# EAGLE board ChessMateBattery_revD (EAGLE 9.1.0)
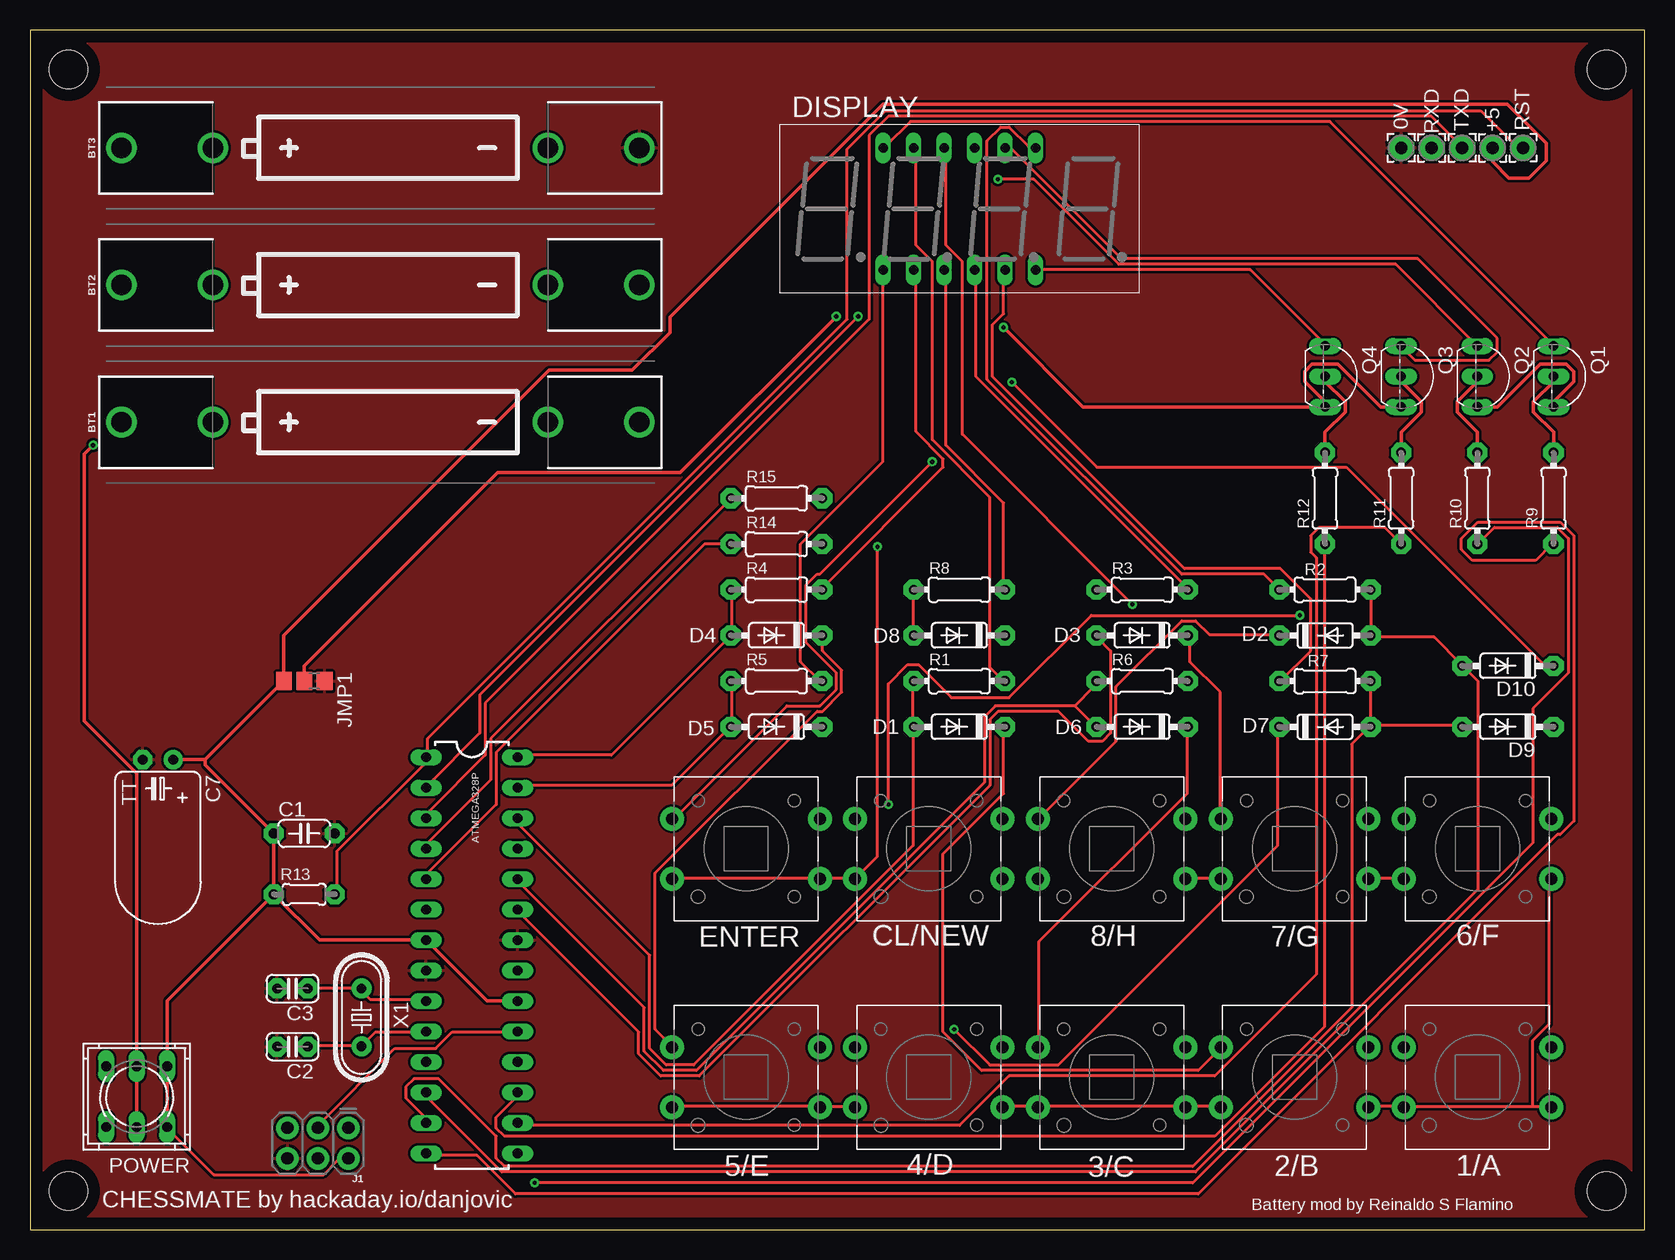
[diagram p0: board, top side]
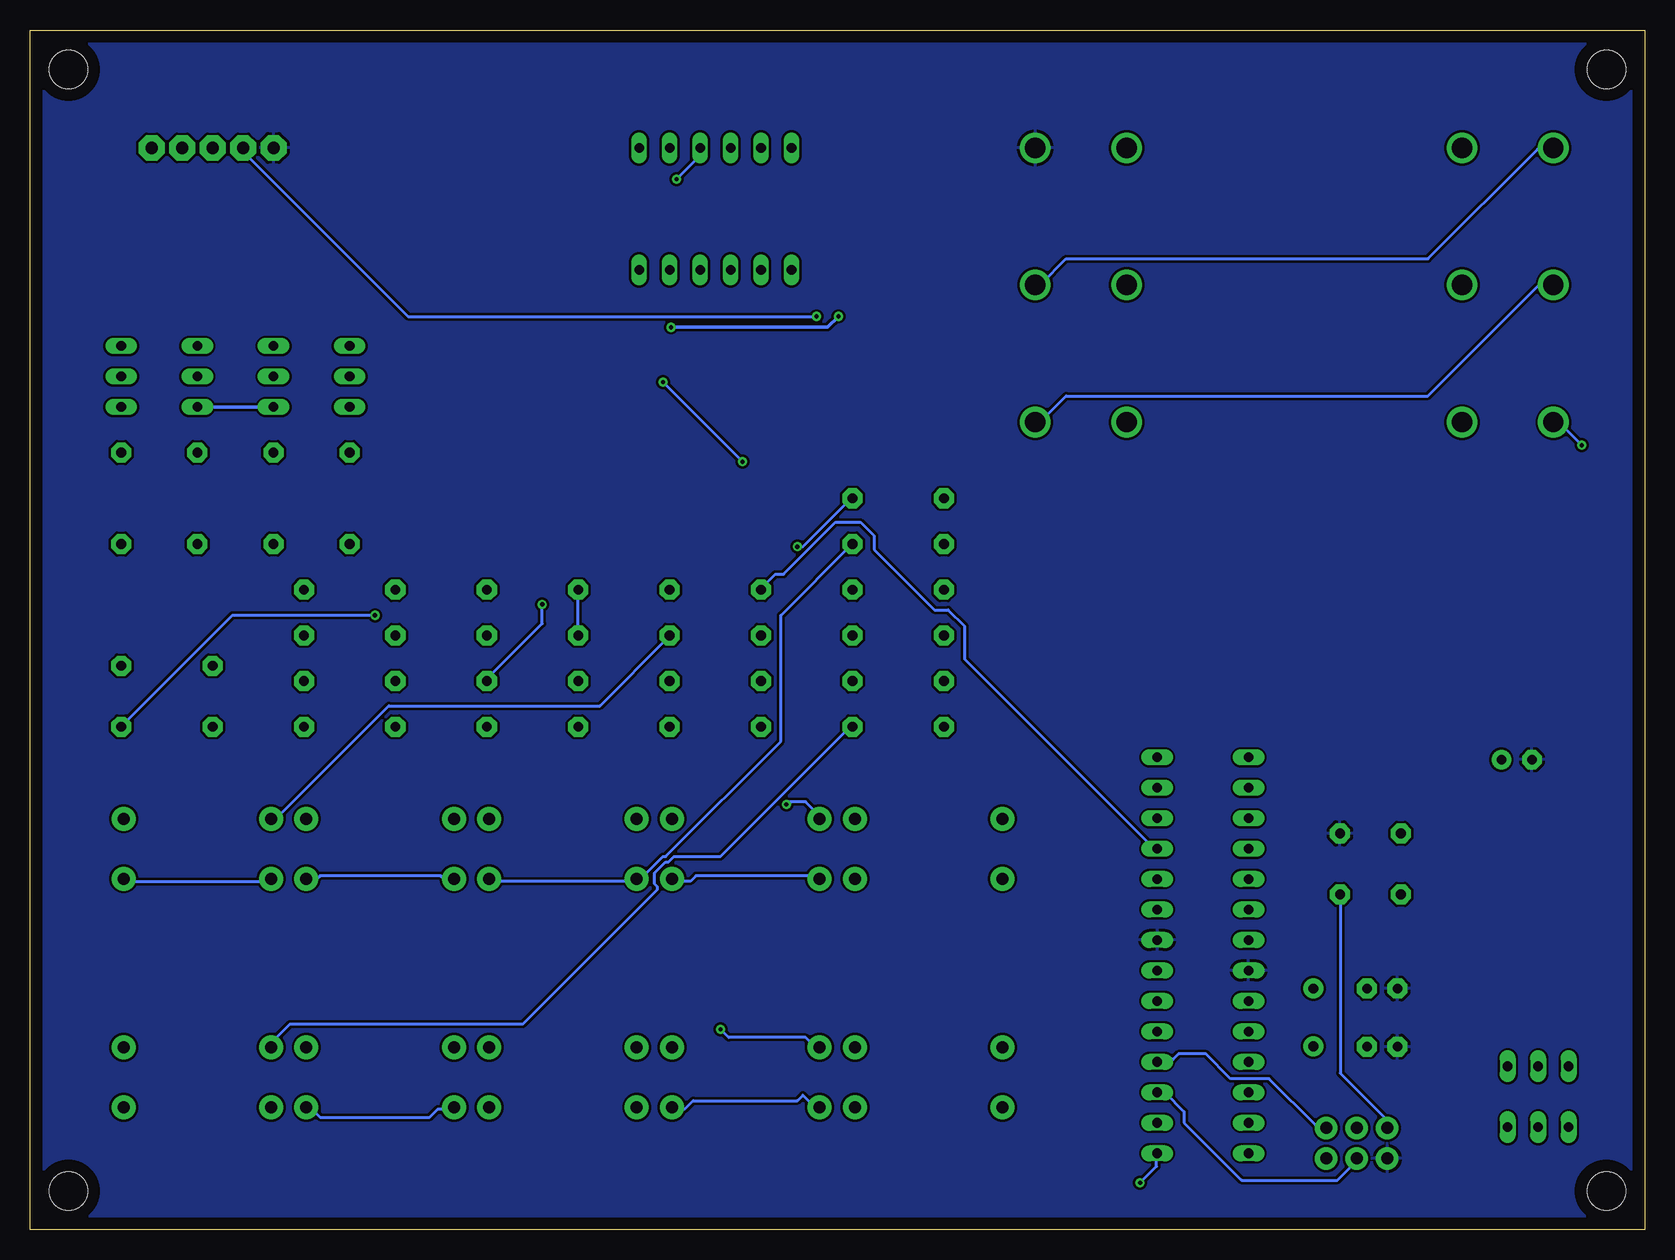
[diagram p1: board, bottom side, seen from below]

Size 134.6 x 100 mm. Coordinates in mm from the lower left corner, seen from the top.
Outline: 0,0 134.6,0 134.6,100 0,100 0,0
Copper layers (1*16): Top 0.035mm / dielectric 1.5mm / Bottom 0.035mm
Design rules "default *": minimum track width 10mil, minimum drill 0.35mm, track to track 8mil, track to pad 8mil, pad to pad 8mil, via to via 8mil, smd to smd 8mil, copper to edge 40mil, drill to drill 6mil, minimum pad ring 10mil, minimum via ring 8mil, stop-mask expansion 4mil, vias tented up to drill 0mil, thermal gap 10mil
Holes 3.2 mm at 3.2,96.7 3.2,3.2 131.4,3.2 131.4,96.7

## Footprints (pad centres in the part's own frame; a part is rotated, then mirrored left to right if it is on the bottom)
2,15/1,0 = drill 1.016 pad 2.159 octagon: 1 0,0
TACT_SW = drill 1 pad 2: A -6.15,2.5; B 6.15,2.5; C -6.15,-2.5; D 6.15,-2.5
DIL28-3 = drill 0.813 long: 1 -16.51,-3.81; 2 -13.97,-3.81; 3 -11.43,-3.81; 4 -8.89,-3.81; 5 -6.35,-3.81; 6 -3.81,-3.81; 7 -1.27,-3.81; 8 1.27,-3.81; 9 3.81,-3.81; 10 6.35,-3.81; 11 8.89,-3.81; 12 11.43,-3.81; 13 13.97,-3.81; 14 16.51,-3.81; 15 16.51,3.81; 16 13.97,3.81; 17 11.43,3.81; 18 8.89,3.81; 19 6.35,3.81; 20 3.81,3.81; 21 1.27,3.81; 22 -1.27,3.81; 23 -3.81,3.81; 24 -6.35,3.81; 25 -8.89,3.81; 26 -11.43,3.81; 27 -13.97,3.81; 28 -16.51,3.81
BATTERY-AAA-KIT = drill 1.702: GND@1 21.59,0; GND@2 13.97,0; PWR@1 -21.59,0; PWR@2 -13.97,0
C050-024X044L = drill 0.813 pad 1.676 octagon: 1 -2.54,0; 2 2.54,0
C025-024X044L = drill 0.813 pad 1.676 octagon: 1 -1.27,0; 2 1.27,0
TT2D7L = drill 0.813 pad 1.6: + -1.27,0 | drill 0.813 pad 1.6 octagon: - 1.27,0
DO35-7 = drill 0.813 pad 1.676 octagon: A 3.81,0; C -3.81,0
TOF3461BH-N = drill 0.8 long: 1 -6.35,-5.08; 2 -3.81,-5.08; 3 -1.27,-5.08; 4 1.27,-5.08; 5 3.81,-5.08; 6 6.35,-5.08; 7 6.35,5.08; 8 3.81,5.08; 9 1.27,5.08; 10 -1.27,5.08; 11 -3.81,5.08; 12 -6.35,5.08
2X3-NS = drill 1.016 pad 1.88: 1 -2.54,-1.27; 2 -2.54,1.27; 3 0,-1.27; 4 0,1.27; 5 2.54,-1.27; 6 2.54,1.27
A0R-JMP = smd 1.5 x 1.3: 1 0,1.7; 2 0,0; 3 0,-1.7
9077-2 = drill 0.813 long: 1 -2.54,2.54; 2 0,2.54; 3 2.54,2.54; 4 -2.54,-2.54; 5 0,-2.54; 6 2.54,-2.54
TO92-EBC = drill 0.813 long: B 0,-1.27; C -2.54,-1.27; E 2.54,-1.27
0204/7L = drill 0.813 pad 1.676 octagon: 1 -3.81,0; 2 3.81,0
0204/5L = drill 0.813 pad 1.676 octagon: 1 -2.54,0; 2 2.54,0
HC49/SL = drill 0.813 pad 1.676: 1 -2.413,0; 2 2.413,0

## Placement (x,y rotation side)
0V  [2,15/1,0]  114.3,90.17 0 top
1/A  1/A  [TACT_SW]  120.65,12.7 0 top
2/B  2/B  [TACT_SW]  105.41,12.7 0 top
3/C  3/C  [TACT_SW]  90.17,12.7 0 top
4/D  4/D  [TACT_SW]  74.93,12.7 0 top
5/E  5/E  [TACT_SW]  59.69,12.7 0 top
6/F  6/F  [TACT_SW]  120.65,31.75 0 top
7/G  7/G  [TACT_SW]  105.41,31.75 0 top
8/H  8/H  [TACT_SW]  90.17,31.75 0 top
+5  [2,15/1,0]  121.92,90.17 180 top
ATMEGA328P  ATMEGA328P  [DIL28-3]  36.83,22.86 270 top
BT1  [BATTERY-AAA-KIT]  29.21,67.31 0 top
BT2  [BATTERY-AAA-KIT]  29.21,78.74 0 top
BT3  [BATTERY-AAA-KIT]  29.21,90.17 0 top
C1  100n  [C050-024X044L]  22.86,33.02 0 top
C2  22P  [C025-024X044L]  21.88,15.24 180 top
C3  22P  [C025-024X044L]  21.88,20.09 180 top
C7  10u  [TT2D7L]  10.67,39.17 180 top
CL/NEW  CL/NEW  [TACT_SW]  74.93,31.75 0 top
D1  4148  [DO35-7]  77.47,41.91 180 top
D2  4148  [DO35-7]  107.95,49.53 0 top
D3  4148  [DO35-7]  92.71,49.53 180 top
D4  4148  [DO35-7]  62.23,49.53 180 top
D5  4148  [DO35-7]  62.23,41.91 180 top
D6  4148  [DO35-7]  92.71,41.91 180 top
D7  4148  [DO35-7]  107.95,41.91 0 top
D8  4148  [DO35-7]  77.47,49.53 180 top
D9  4148  [DO35-7]  123.19,41.91 180 top
D10  4148  [DO35-7]  123.19,46.99 180 top
DISPLAY  [TOF3461BH-N]  77.47,85.09 0 top
ENTER  ENTER  [TACT_SW]  59.69,31.75 0 top
J1  AVR_SPI_PROG_3X2NS  [2X3-NS]  24,7.2 180 top
JMP1  0R-JUMPA  [A0R-JMP]  22.86,45.72 270 top
POWER  9077-2  [9077-2]  8.89,11.07 180 top
Q1  BC3x8  [TO92-EBC]  128.27,71.12 270 top
Q2  BC3x8  [TO92-EBC]  121.92,71.12 270 top
Q3  BC3x8  [TO92-EBC]  115.57,71.12 270 top
Q4  BC3x8  [TO92-EBC]  109.22,71.12 270 top
R1  470  [0204/7L]  77.47,45.72 0 top
R2  470  [0204/7L]  107.95,53.34 180 top
R3  470  [0204/7L]  92.71,53.34 0 top
R4  470  [0204/7L]  62.23,53.34 0 top
R5  470  [0204/7L]  62.23,45.72 0 top
R6  470  [0204/7L]  92.71,45.72 0 top
R7  470  [0204/7L]  107.95,45.72 180 top
R8  470  [0204/7L]  77.47,53.34 0 top
R9  10k  [0204/7L]  127,60.96 90 top
R10  10k  [0204/7L]  120.65,60.96 90 top
R11  10k  [0204/7L]  114.3,60.96 90 top
R12  10k  [0204/7L]  107.95,60.96 90 top
R13  10K  [0204/5L]  22.86,27.94 0 top
R14  10k  [0204/7L]  62.23,57.15 0 top
R15  10k  [0204/7L]  62.23,60.96 0 top
RST  [2,15/1,0]  124.46,90.17 0 top
RXD  [2,15/1,0]  116.84,90.17 180 top
TXD  [2,15/1,0]  119.38,90.17 0 top
X1  16.0  [HC49/SL]  27.63,17.68 90 top

## Library data of the parts
0V +5 RST RXD TXD = wirepad
1/A 2/B 3/C 4/D 5/E 6/F 7/G 8/H CL/NEW D1-D10 ENTER = XessMate
ATMEGA328P = SparkFun-DigitalIC
BT1-BT3 = SparkFun-Batteries; PROD_ID: BATT-08571; SF_SKU: PRT-12718
C1-C3 C7 R1-R15 = rcl
DISPLAY = 7Segment-Displays
J1 = SparkFun-Connectors
JMP1 = jump-0r-smd
POWER = switch-misc
Q1-Q4 = transistor-npn
X1 = crystal

## Nets
A: ATMEGA328P.26 D1.A R1.1
B: ATMEGA328P.12 D2.A D10.A R2.1
C: ATMEGA328P.23 D3.A R3.1
CONTROLE: ATMEGA328P.4 R15.1
CONTROLE_: CL/NEW.C CL/NEW.D ENTER.C ENTER.D R15.2
D: ATMEGA328P.28 D4.A R4.1
DP: ATMEGA328P.25 D8.A R8.1
E: ATMEGA328P.27 D5.A R5.1
F: ATMEGA328P.24 D6.A R6.1
G: ATMEGA328P.13 D7.A D9.A R7.1
GND: 0V.1 ATMEGA328P.8 ATMEGA328P.22 BT3.GND@1 C1.2 C2.2 C3.2 C7.- J1.6 JMP1.1
JOGADA: ATMEGA328P.5 R14.1
JOGADA_C: 1/A.C 1/A.D 2/B.C 2/B.D 3/C.C 3/C.D 4/D.C 4/D.D 5/E.C 5/E.D 6/F.C 6/F.D 7/G.C 7/G.D 8/H.C 8/H.D R14.2
K1: ATMEGA328P.14 R9.1
K2: ATMEGA328P.15 R10.1
K3: ATMEGA328P.16 R11.1
K4: ATMEGA328P.17 J1.4 R12.1
MISO: ATMEGA328P.18 J1.1
N$1: DISPLAY.11 R1.2
N$2: DISPLAY.7 R2.2
N$3: DISPLAY.4 R3.2
N$4: DISPLAY.2 R4.2
N$5: DISPLAY.1 R5.2
N$6: DISPLAY.10 R6.2
N$7: DISPLAY.5 R7.2
N$8: DISPLAY.3 R8.2
N$9: Q1.B R9.2
N$10: Q2.B R10.2
N$11: Q3.B R11.2
N$12: Q4.B R12.2
N$13: DISPLAY.12 Q1.C
N$14: DISPLAY.9 Q2.C
N$15: DISPLAY.8 Q3.C
N$16: DISPLAY.6 Q4.C
N$18: ATMEGA328P.9 C3.1 X1.2
N$19: ATMEGA328P.10 C2.1 X1.1
N$20: BT1.PWR@1 POWER.2 POWER.5
N$21: CL/NEW.A D9.C
N$22: D10.C ENTER.A
N$23: 2/B.A D1.C
N$24: 8/H.A D2.C
N$25: 5/E.A D4.C
N$26: 1/A.A D5.C
N$27: 3/C.A D6.C
N$28: 4/D.A D7.C
N$29: 6/F.A D8.C
N$30: 7/G.A D3.C
N$31: BT1.GND@1 BT2.PWR@1
N$33: BT2.GND@1 BT3.PWR@1
N$42: JMP1.2 Q1.E Q2.E Q3.E Q4.E
RST: ATMEGA328P.1 J1.5 R13.2 RST.1
RX-IN: ATMEGA328P.2 RXD.1
SCK: ATMEGA328P.19 J1.3
TX-OUT: ATMEGA328P.3 TXD.1
VCC: +5.1 ATMEGA328P.7 ATMEGA328P.20 C1.1 C7.+ J1.2 JMP1.3 POWER.1 POWER.4 R13.1

## Tracks (layer width: path | path; a pad name or v marks a point on that pad's centre or on a via)
A
  Top 0.254: ATMEGA328P.26 40.69,34.29 40.69,33.83 51.66,22.86 51.66,15.09 53.03,13.72 55.32,13.72 73.61,32 73.61,41.83 D1.A 73.61,42.06 73.61,45.72 R1.1
B
  Top 0.254: R2.1 111.78,53.26 111.78,49.61 D2.A 111.78,49.38 117.04,49.38 119.33,47.09 D10.A 119.56,46.86 120.7,45.72 120.7,28.35 97.16,4.8 39.32,4.8 33.15,10.97 33.15,11.43 ATMEGA328P.12
C
  Top 0.254: ATMEGA328P.23 40.69,26.52 50.75,16.46 50.75,14.63 52.58,12.8 55.78,12.8 80.01,37.03 80.01,42.52 80.7,43.2 85.72,43.2 88.24,40.69 89.38,40.69 90.07,41.38 90.07,48.23 88.92,49.38 D3.A
  Bottom 0.254: R3.1 88.92,53.26 88.92,49.61 D3.A
CONTROLE
  Top 0.254: ATMEGA328P.4 33.15,31.77 33.15,32.23 38.41,37.49 38.41,40.92 58.29,60.81 R15.1
CONTROLE_  (via drill 0.35)
  Top 0.254: ENTER.C 53.72,29.26 ENTER.D 66.06,29.26 68.58,29.26 CL/NEW.C 68.81,29.26 70.64,31.09 v70.64,56.92
  Bottom 0.254: v70.64,56.92 70.18,56.92 66.29,60.81 66.06,60.81 R15.2 | CL/NEW.D 80.92,29.03 79.55,29.03 79.1,29.49 69.04,29.49 68.81,29.26 CL/NEW.C
D
  Top 0.254: ATMEGA328P.28 40.69,39.55 48.46,39.55 58.29,49.38 D4.A 58.52,49.61 58.52,53.26 R4.1
DP
  Top 0.254: D8.A 73.61,49.61 73.61,53.26 R8.1
  Bottom 0.254: ATMEGA328P.25 40.69,31.77 41.15,32.23 41.38,32.23 56.69,47.55 56.69,50.29 58.06,51.66 59.21,51.66 64.24,56.69 64.24,57.84 65.38,58.98 67.44,58.98 71.78,54.63 72.47,54.63 73.61,53.49 R8.1
E
  Top 0.254: ATMEGA328P.27 40.69,37.03 53.49,37.03 58.29,41.83 D5.A 58.52,42.06 58.52,45.72 R5.1
F
  Top 0.254: 87.1,43.66 80.47,43.66 79.55,42.75 79.55,37.26 55.55,13.26 52.81,13.26 51.21,14.86 51.21,18.52 40.69,29.03 ATMEGA328P.24 | 87.1,43.66 88.7,42.06 D6.A | 87.1,43.66 88.7,45.26 88.7,45.72 R6.1
G
  Top 0.254: ATMEGA328P.13 32.92,8.91 32.92,9.37 31.32,10.97 31.32,11.89 32,12.57 34.06,12.57 38.86,7.77 38.86,5.94 39.55,5.26 96.93,5.26 110.19,18.52 110.19,40.46 111.56,41.83 D7.A 111.78,42.06 | 111.78,42.06 111.78,45.72 R7.1 | 111.78,42.06 119.33,42.06 D9.A
GND
  pour Top: 0,100.03 134.62,100.03 134.62,0 0,0
  pour Bottom: 0,100.03 134.62,100.03 134.62,0 0,0
JOGADA
  Top 0.254: R14.1 56.24,57.15 38.86,39.78 38.86,35.43 33.15,29.72 33.15,29.26 ATMEGA328P.5
JOGADA_C
  Top 0.254: 5/E.C 53.72,10.29 65.84,10.29 5/E.D 66.06,10.29 68.58,10.29 4/D.C | 4/D.D 81.15,10.29 83.9,10.29 3/C.C 84.12,10.29 96.24,10.29 3/C.D 96.47,10.29 99.21,10.29 2/B.C | 7/G.D 111.78,29.26 114.3,29.26 6/F.C | 2/B.D 111.78,10.29 114.3,10.29 1/A.C 114.53,10.29 125.27,10.29 | 125.27,10.29 126.64,10.29 1/A.D | 125.27,10.29 125.27,15.77 126.64,17.14 126.64,29.03 6/F.D | 8/H.D 96.47,29.26 99.21,29.26 7/G.C
  Bottom 0.254: 4/D.C 68.81,10.29 69.27,10.29 70.18,11.2 70.64,10.74 79.32,10.74 80.01,10.06 80.92,10.06 4/D.D | 6/F.C 114.53,29.03 126.64,29.03 6/F.D | R14.2 66.06,57.15 72.01,51.21 72.01,40.69 81.61,31.09 81.84,31.09 83.9,29.03 8/H.C 84.12,29.03 96.24,29.03 8/H.D | 7/G.D 110.64,29.26 110.41,29.49 100.36,29.49 100.13,29.26 99.44,29.26 7/G.C | 2/B.C 99.44,10.06 100.58,10.06 101.27,9.37 110.41,9.37 111.1,10.06 111.56,10.06 2/B.D
K1
  Top 0.254: ATMEGA328P.14 33.15,6.17 37.26,6.17 40.46,2.97 97.38,2.97 127.33,32.92 127.56,32.92 128.7,34.06 128.7,57.84 127.56,58.98 120.7,58.98 119.33,57.61 119.33,56.69 120.24,55.78 125.5,55.78 126.87,57.15 R9.1
K2  (via drill 0.35)
  Top 0.254: v42.06,3.89 96.93,3.89 125.27,32.23 125.27,43.43 128.25,46.41 128.25,57.61 127.33,58.52 122.07,58.52 120.7,57.15 R10.1
  Bottom 0.254: v42.06,3.89 40.69,5.26 40.69,6.17 ATMEGA328P.15
K3
  Top 0.254: R11.1 112.93,58.52 107.44,58.52 106.76,57.84 106.76,56.46 107.21,56.01 107.21,21.26 98.75,12.8 81.61,12.8 77.5,8.69 40.69,8.69 ATMEGA328P.16
K4
  Top 0.254: ATMEGA328P.17 40.46,11.43 40.46,10.97 38.86,9.37 38.86,8.46 39.55,7.77 98.75,7.77 107.9,16.92 107.9,57.15 R12.1
  Bottom 0.254: J1.4 24,5.71 25.6,4.12 33.6,4.12 38.41,8.91 38.41,9.83 40.01,11.43 40.46,11.43 ATMEGA328P.17
MISO
  Bottom 0.254: ATMEGA328P.18 40.46,14.17 39.32,14.17 38.86,14.63 36.58,14.63 34.52,12.57 31.32,12.57 27.43,8.69 26.75,8.69 J1.1
N$1
  Top 0.254: DISPLAY.11 73.84,90.07 73.84,82.07 75.21,80.7 75.21,65.84 80.01,61.04 80.01,46.86 81.15,45.72 R1.2
N$2
  Top 0.254: DISPLAY.7 83.67,90.3 83.21,90.3 81.61,91.9 80.92,91.9 79.78,90.75 79.78,70.87 96.01,54.63 102.87,54.63 104.01,53.49 R2.2
N$3
  Top 0.254: DISPLAY.4 78.87,80.01 78.87,71.09 96.47,53.49 R3.2
N$4
  Top 0.254: DISPLAY.2 73.84,80.01 73.84,66.52 76.12,64.24 76.12,63.55 66.06,53.49 R4.2
N$5
  Top 0.254: DISPLAY.1 71.09,80.01 71.09,64.01 64.24,57.15 64.24,47.32 65.84,45.72 R5.2
N$6  (via drill 0.35)
  Top 0.254: v91.9,52.12 77.72,66.29 77.72,80.7 76.35,82.07 76.35,90.07 DISPLAY.10
  Bottom 0.254: v91.9,52.12 91.9,50.52 96.7,45.72 R6.2
N$7
  Top 0.254: DISPLAY.5 81.15,80.01 81.15,76.35 80.24,75.44 80.24,71.09 96.24,55.09 104.24,55.09 106.76,52.58 106.76,48.23 104.24,45.72 R7.2
N$8
  Top 0.254: DISPLAY.3 76.35,80.01 76.35,65.38 81.15,60.58 81.15,53.49 R8.2
N$9
  Top 0.305: R9.2 127,66.48 125.32,68.16 125.32,69 127,70.68 Q1.B
N$10
  Top 0.305: Q2.B 120.65,70.68 118.97,69 118.97,68.16 120.65,66.48 R10.2
N$11
  Top 0.305: Q3.B 114.3,70.68 115.98,69 115.98,68.16 114.3,66.48 R11.2
N$12
  Top 0.305: R12.2 107.95,66.48 109.63,68.16 109.63,69 107.95,70.68 Q4.B
N$13
  Top 0.254: DISPLAY.12 71.32,90.3 73.38,92.35 108.36,92.35 126.87,73.84 Q1.C
N$14  (via drill 0.35)
  Top 0.254: v80.7,87.55 83.67,87.55 90.75,80.47 113.84,80.47 Q2.C
  Bottom 0.254: v80.7,87.55 78.87,89.38 78.87,90.07 DISPLAY.9
N$15
  Top 0.254: DISPLAY.8 81.38,90.07 81.84,90.07 90.98,80.92 115.67,80.92 122.3,74.3 122.3,73.15 121.61,72.47 115.44,72.47 114.3,73.61 Q3.C
N$16
  Top 0.254: DISPLAY.6 101.73,80.01 107.9,73.84 Q4.C
N$18
  Top 0.254: 32.92,19.2 ATMEGA328P.9 32.92,19.2 | 32.92,19.2 28.35,19.2 27.66,19.89 X1.2 27.43,20.12 23.32,20.12 C3.1
N$19
  Top 0.254: 32.92,16.46 ATMEGA328P.10 32.92,16.46 | 32.92,16.46 28.8,16.46 27.66,15.32 X1.1 27.43,15.32 23.32,15.32 C2.1
N$20  (via drill 0.35)
  Top 0.305: POWER.2 POWER.5 8.89,38.04 4.52,42.41 4.52,64.64 v5.26,65.38
  Bottom 0.254: v5.26,65.38 7.09,67.21 7.54,67.21 BT1.PWR@1
N$21  (via drill 0.35)
  Top 0.254: v105.84,51.21 88.47,51.21 81.61,44.35 76.81,44.35 74.07,47.09 73.15,47.09 71.55,45.49 v71.55,35.43
  Bottom 0.254: v105.84,51.21 117.73,51.21 126.87,42.06 D9.C | v71.55,35.43 71.32,35.66 69.95,35.66 68.58,34.29 CL/NEW.A
N$22  (via drill 0.35)
  Top 0.254: v81.84,70.64 88.92,63.55 109.73,63.55 126.19,47.09 126.87,47.09 D10.C | v75.21,64.01 65.84,54.63 65.61,54.63 64.69,53.72 64.69,48.92 67.21,46.41 67.21,45.03 65.84,43.66 63.09,43.66 53.72,34.29 ENTER.A
  Bottom 0.254: v75.21,64.01 v81.84,70.64
N$23
  Top 0.254: D1.C 81.15,41.83 81.15,36.35 76.12,31.32 76.12,16.46 79.32,13.26 97.38,13.26 99.21,15.09 2/B.A
N$24
  Top 0.254: D2.C 104.01,49.61 98.3,49.61 97.16,50.75 96.01,50.75 90.53,45.26 90.53,40.69 84.12,34.29 8/H.A
N$25
  Top 0.254: D4.C 66.06,49.38 66.06,48.23 67.67,46.63 67.67,44.81 66.06,43.2 65.61,43.2 52.12,29.72 52.12,16.69 53.49,15.32 5/E.A
N$26
  Bottom 0.254: D5.C 66.06,41.83 66.29,41.83 77.04,31.09 80.92,31.09 81.38,30.63 81.61,30.63 82.53,29.72 82.53,28.8 82.3,28.57 82.3,28.35 93.5,17.14 112.93,17.14 114.3,15.77 114.3,15.32 1/A.A
N$27
  Top 0.254: D6.C 96.47,41.83 96.47,36.35 84.12,24 84.12,15.32 3/C.A
N$28  (via drill 0.35)
  Top 0.254: v77.04,16.69 80.01,13.72 85.72,13.72 104.01,32 104.01,41.83 D7.C
  Bottom 0.254: v77.04,16.69 76.35,16 69.95,16 69.27,15.32 68.81,15.32 4/D.A
N$29
  Bottom 0.254: D8.C 81.38,49.38 87.1,43.66 104.7,43.66 114.3,34.06 6/F.A
N$30
  Top 0.254: D3.C 96.7,49.38 96.7,47.32 99.21,44.81 99.21,34.29 7/G.A
N$31
  Bottom 0.254: BT2.PWR@1 7.77,78.64 8.91,78.64 18.06,69.49 48.23,69.49 50.29,67.44 50.75,67.44 BT1.GND@1
N$33
  Bottom 0.254: BT3.PWR@1 7.77,90.07 8.91,90.07 18.06,80.92 48.23,80.92 50.29,78.87 50.75,78.87 BT2.GND@1
N$42  (via drill 0.35)
  Top 0.305: JMP1.2 22.86,46.99 38.96,63.09 54.18,63.09 v67.21,76.12 | v81.15,75.21 87.78,68.58 Q4.E 107.95,69.02 106.27,70.7 106.27,71.54 106.87,72.14 109.03,72.14 112.59,68.58 Q3.E | Q2.E 122.33,68.58 125.88,72.14 128.08,72.14 128.68,71.54 128.68,70.7 127,69.02 Q1.E
  Bottom 0.305: v67.21,76.12 68.12,75.21 v81.15,75.21 | Q3.E Q2.E
RST
  Top 0.254: R13.2 25.6,28.12 25.6,31.55 32.92,38.86 32.92,39.32 ATMEGA328P.1 33.15,39.55 33.15,40.92 68.12,75.89 68.12,90.07 71.32,93.27 120.93,93.27 123.9,90.3 124.36,90.3 RST.1
  Bottom 0.254: J1.5 21.49,8.69 21.49,9.14 25.38,13.03 25.38,27.89 R13.2
RX-IN  (via drill 0.35)
  Top 0.254: v69.04,76.12 37.49,44.58 37.49,41.38 33.15,37.03 ATMEGA328P.2
  Bottom 0.254: v69.04,76.12 103.1,76.12 117.04,90.07 RXD.1
SCK
  Top 0.254: ATMEGA328P.19 40.46,16.46 35.2,16.46 33.83,15.09 30.4,15.09 24,8.69 J1.3
TX-OUT
  Top 0.254: ATMEGA328P.3 33.15,34.29 33.15,34.75 37.95,39.55 37.95,43.89 69.95,75.89 69.95,91.21 71.55,92.81 116.81,92.81 119.33,90.3 TXD.1
VCC
  Top 0.254: J1.2 26.52,5.71 25.6,5.71 24.46,4.57 15.32,4.57 11.43,8.46 POWER.1
  Top 0.305: POWER.1 POWER.4 11.43,19.05 R13.1 | R13.1 24.13,24.13 ATMEGA328P.7 38.1,19.05 ATMEGA328P.20 | +5.1 121.92,89 123.29,87.63 124.92,87.63 126.39,89.1 126.39,90.58 123.14,93.83 71.12,93.83 53.34,76.05 53.34,74.76 50.2,71.63 43.28,71.63 21.16,49.51 JMP1.3 14.61,39.17 | 14.61,39.17 C7.+ | 14.61,39.17 14.61,38.73 C1.1 R13.1

## Text on the board
tPlace: CHESSMATE by hackaday.io/danjovic | Battery mod by Reinaldo S Flamino